# Altium PCB USB TO TTL_BT5032.PcbDoc
Units mil, origin at the board's own origin, x right, y up, seen from the top; angles counter-clockwise.
Board outline 1496.06 x 905.51 mil, 2 copper layers (Top Layer, Bottom Layer); 13 components, 12 nets, 74 pads, 32 vias.
Unrouted connection lines stored in the file: 11.
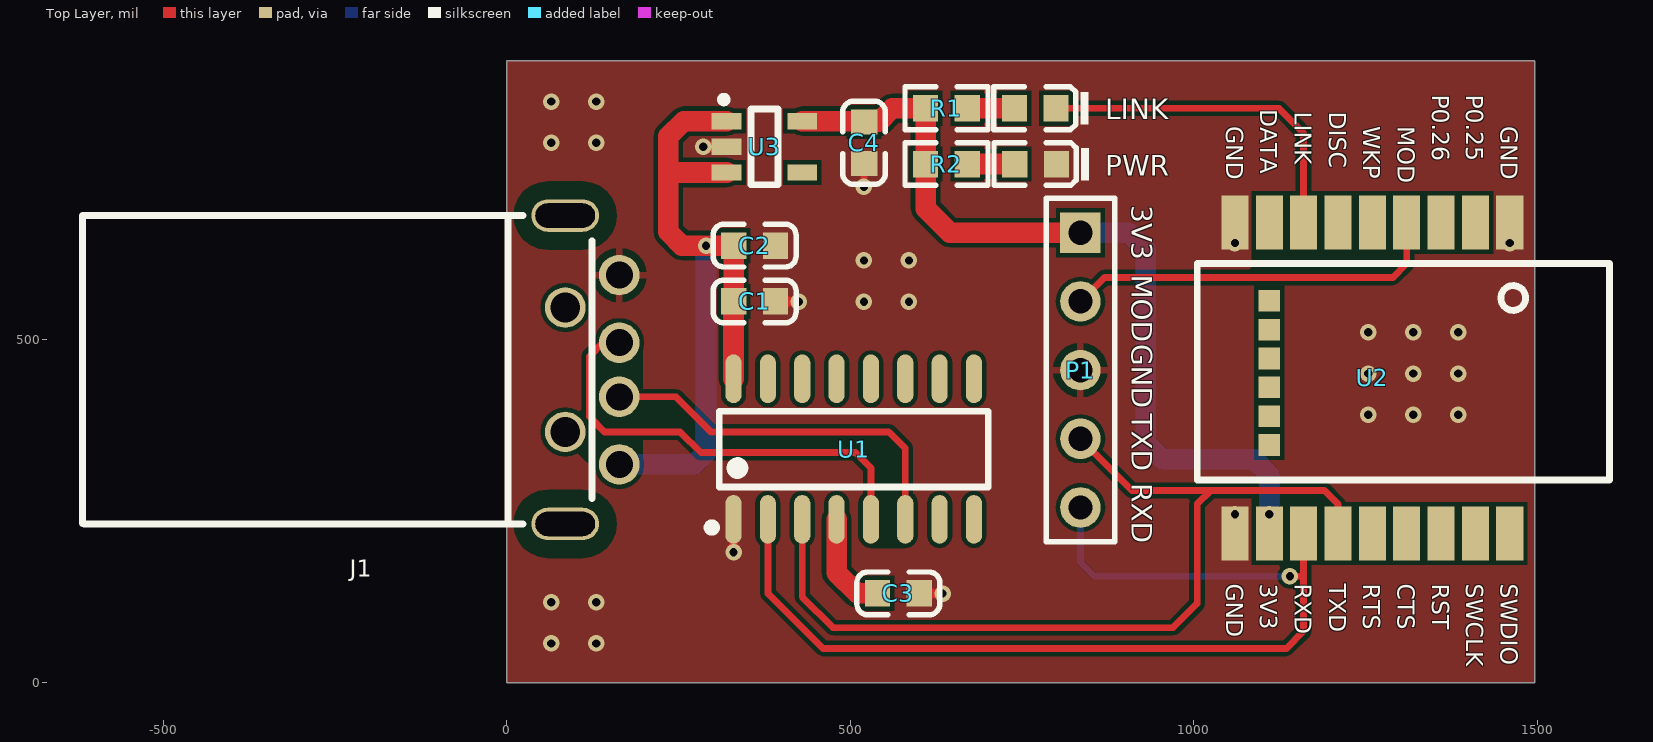
[diagram p0: Top Layer view]
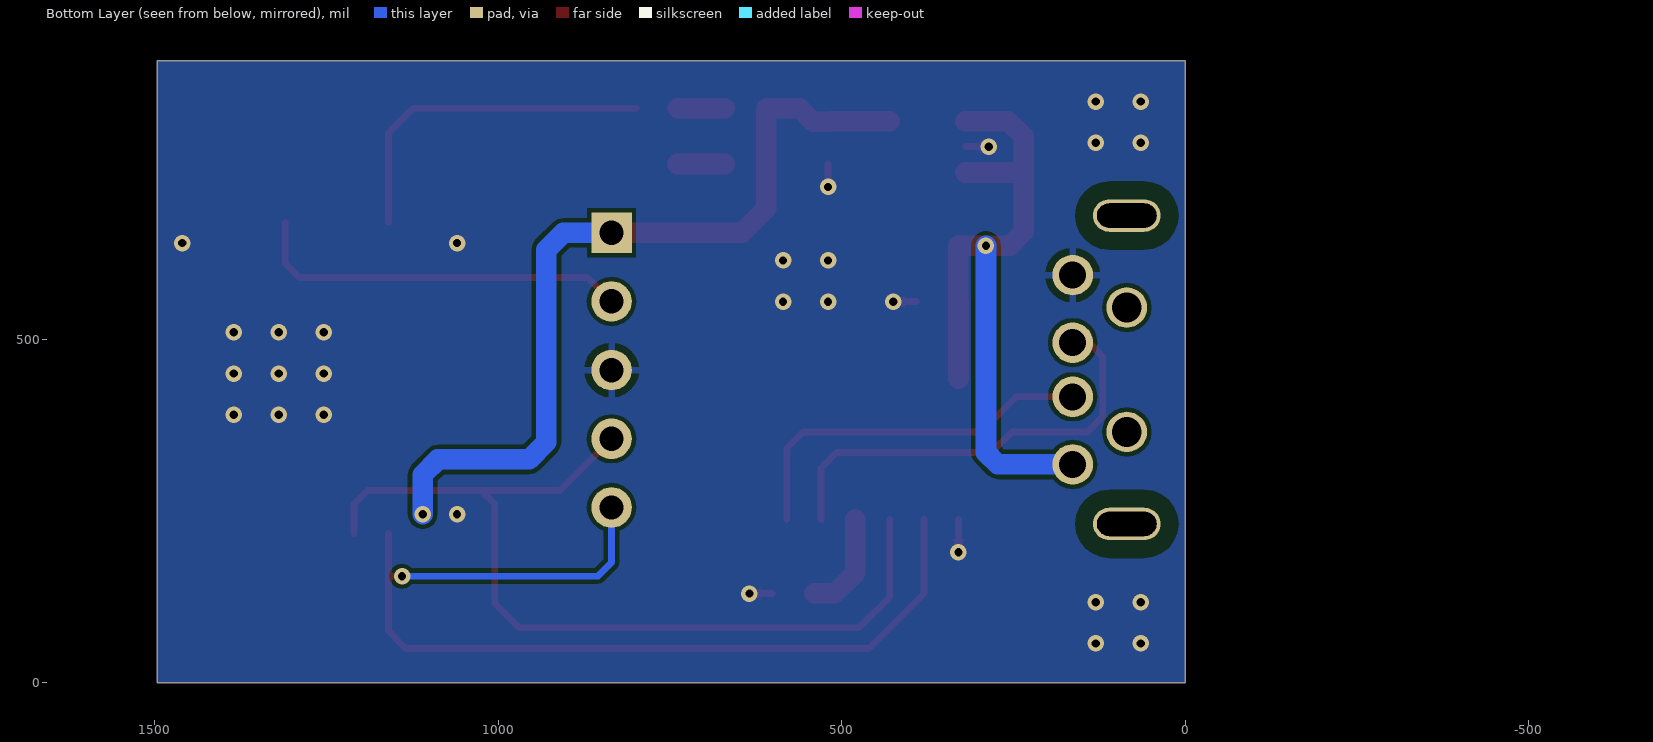
[diagram p1: Bottom Layer view, seen from below]
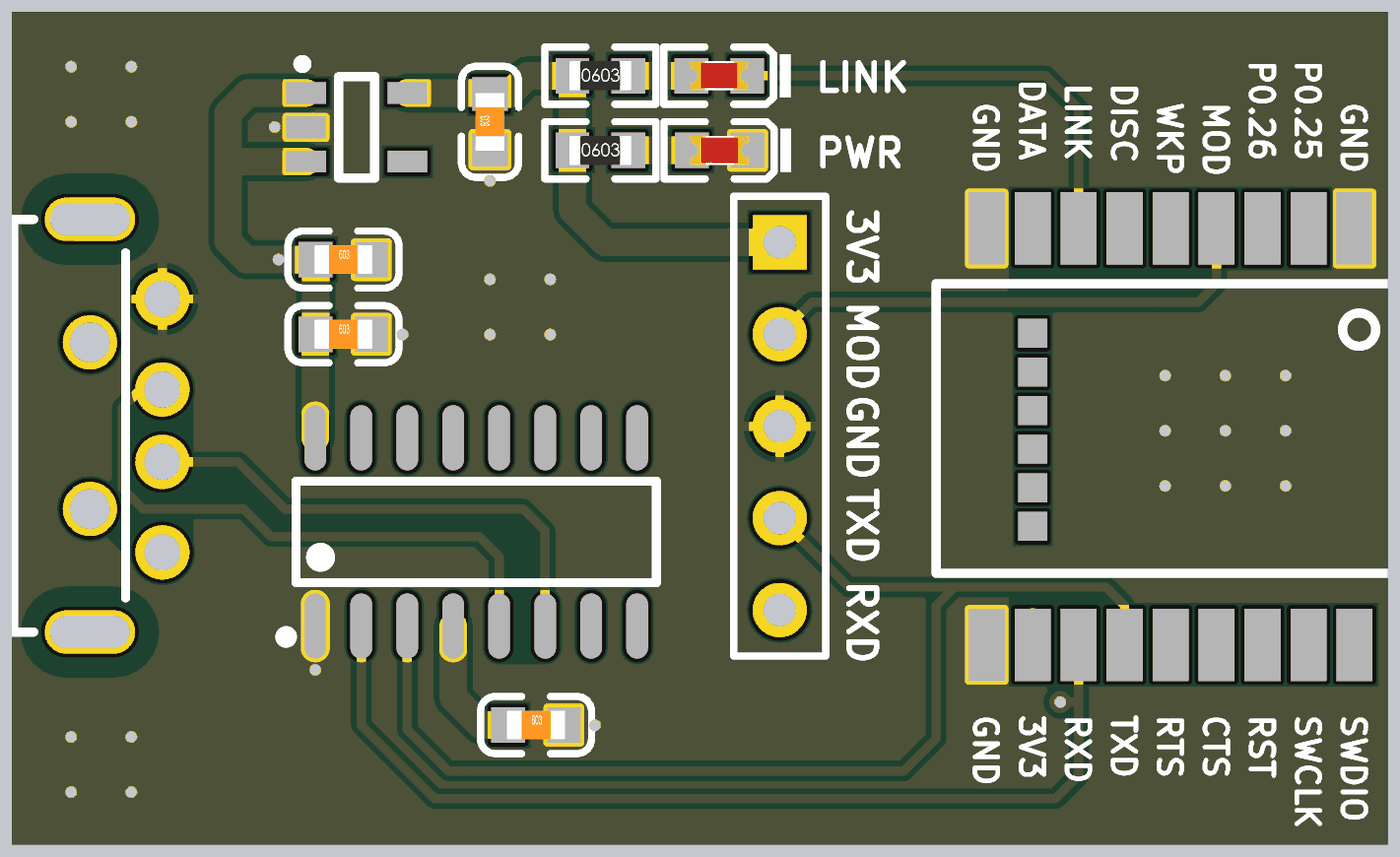
[diagram p2: 3D render of the assembled board from above, using the file's embedded part models]

## Layer stack, top to bottom
Top Solder: solder mask 0.4, Solder Resist, Dk 3.5
Top Layer: signal copper 1.4
Dielectric 1: dielectric 12.6, FR-4, Dk 4.8
Bottom Layer: signal copper 1.4
Bottom Solder: solder mask 0.4, Solder Resist, Dk 3.5

## Board outline
0,0 0,905.51 1496.06,905.51 1496.06,0

## Design rules (kind name [scope] priority, off if disabled: settings)
Clearance [All] p1: gap=6 ignorepadtopadclearanceinfootprint=FALSE
PolygonConnect [All] p1: thpad.connectstyle=Relief thpad.reliefconductorwidth=10 thpad.reliefentries=4 thpad.polygonreliefangle="90 Angle" thpad.airgapwidth=10 smdpad.connectstyle=Direct smdpad.reliefconductorwidth=10 smdpad.reliefentries=4 smdpad.polygonreliefangle="90 Angle" smdpad.airgapwidth=10 via.connectstyle=Direct via.reliefconductorwidth=10 via.reliefentries=4 via.polygonreliefangle="90 Angle" via.airgapwidth=10
RoutingVias [All] p1: holewidth=28 width=50 viastyle="Through Hole" minholewidth=28 minwidth=50 maxholewidth=28 maxwidth=50
SolderMaskExpansion [All] p1: expansion=4
Width [All] p1: maxlimit=30 minlimit=10 preferedwidth=10
30 further rules are at their usual default settings.

## Components (designator, comment, footprint, x,y, rotation, side; value= is the part's Value field where it differs from the comment)
C1 "10uF (106) 20% 6.3V" 0603_C 360.63,555 r0 top
C2 "100nF (104) 10% 16V" 0603_C 360.63,636.18 r0 top
C3 "100nF" 0603_C 570,130 r0 top
C4 "1uF (105) 10% 50V" 0603_C 520,786.01 r90 top
J1 "787616-4" USB-A直插公头 163.74,593.35 r270 top
LINK "绿灯 0603" 0603_LED_S1 769.24,836.18 r180 top
P1 "Header 5" HDR1X5 835,655 r270 top
PWR "红灯 0603" 0603_LED_S1 769.69,755 r180 top
R1 "510Ω" 0603_R 640,836.18 r0 top
R2 "1KΩ" 0603_R 640,755 r0 top
U1 "CH340C" SOIC-16_150mil 505,340 r0 top
U2 "nRF52832" nRF52832 1275,480 r90 top
U3 "SPX5205" SOT-23-5 375,780 r180 top

## Footprints (in the part's own frame and the unit in brackets; to place one, negate y for a bottom-side part, rotate by r counter-clockwise, add the part's x,y. Pads: shape width x height; smd on the part's side, far side on the other; paste and mask are expansions set on the pad)
0603_C [mm]
  rect 0.93x0.98 smd: 1(-0.77,0) 2(0.77,0)
  silkscreen extent -1.53,-0.79 1.54,0.79, body extent -0.8,-0.4 0.8,0.4, height 0.3
0603_LED_S1 [mm]
  rect 0.93x0.98 smd: A(0.77,0) K(-0.77,0)
  silkscreen extent -1.98,-0.79 1.54,0.79, body extent -0.8,-0.4 0.8,0.4, height 0.6
0603_R [mm]
  rect 0.93x0.98 smd: 1(-0.77,0) 2(0.77,0)
  silkscreen extent -1.53,-0.79 1.54,0.79, body extent -0.85,-0.4 0.85,0.4, height 0.56
HDR1X5 [mm] "Connector; Header; 5 Position"
  rect 1.5x1.5 hole 0.9: 1(0,0)
  round 1.5 hole 0.9: 2(2.54,0) 3(5.08,0) 4(7.62,0) 5(10.16,0)
  silkscreen extent -1.27,-1.27 11.43,1.27
nRF52832 [mm]
  rect 2x1 smd: 1(4.826,-4.699) 2(4.826,-3.429) 3(4.826,-2.159) 4(4.826,-0.889) 5(4.826,0.381) 6(4.826,1.651) 7(4.826,2.921) 8(4.826,4.191) 9(4.826,5.461) 16(-6.674,5.461) 17(-6.674,4.191) 18(-6.674,2.921) 19(-6.674,1.651) 20(-6.674,0.381) 21(-6.674,-0.889) 22(-6.674,-2.159) 23(-6.674,-3.429) 24(-6.674,-4.699)
  rect 0.8x0.8 smd: 10(1.93,4.191) 11(0.864,4.191) 12(-0.203,4.191) 13(-1.27,4.191) 14(-2.337,4.191) 15(-3.404,4.191)
  silkscreen extent -4.7,-8.38 3.3,6.86
SOIC-16_150mil [mm]
  oval 0.6x1.8 smd: 1(-4.445,-2.6) 2(-3.175,-2.6) 3(-1.905,-2.6) 4(-0.635,-2.6) 5(0.635,-2.6) 6(1.905,-2.6) 7(3.175,-2.6) 8(4.445,-2.6) 9(4.445,2.6) 10(3.175,2.6) 11(1.905,2.6) 12(0.635,2.6) 13(-0.635,2.6) 14(-1.905,2.6) 15(-3.175,2.6) 16(-4.445,2.6)
  silkscreen extent -5.4,-3.05 4.97,1.4
SOT-23-5 [mm]
  rect 1.1x0.6 smd: 1(1.4,-0.95) 2(1.4,0) 3(1.4,0.95) 4(-1.4,0.95) 5(-1.4,-0.95)
  silkscreen extent -0.5,-1.87 1.62,1.4
USB-A直插公头 [mm]
  round 1.5 hole 1: 1(7,0) 2(4.5,0) 3(2.5,0) 4(0,0)
  oval 1.2x2.5 hole 2.2 slot 0.9 at 0 deg: 5(-2.2,-2) 6(9.2,-2)
  round 1.5 hole 1.1: ""(1.2,-2) ""(5.8,-2)
  silkscreen extent -2.2,-19.84 9.2,-1.02

## Part data
C1: library part "0402 10uF (106) 20% 6.3V", "贴片电容", Package=0402, SuppliersPartNumber=C15525, ComponentLink1Description=供应商, ComponentLink1URL=http://www.szlcsc.com/product/details_16204.html, Supplier=LC
C2 C3: library part "0402 100nF (104) 10% 16V", "贴片电容", Package=0402, SuppliersPartNumber=C1525, ComponentLink1Description=供应商, ComponentLink1URL=http://www.szlcsc.com/product/details_1877.html, Supplier=LC
C4: library part "0603 1uF (105) 10% 50V", "贴片电容", Package=0603, SuppliersPartNumber=C15849, ComponentLink1Description=供应商链接, ComponentLink1URL=http://www.szlcsc.com/product/details_16531.html, Supplier=LC
J1: "USB 1.1, Right Angle, Thru-Hole, A Type, Receptacle, 4 Position, Black", PackageDocument=11-Jan-2004, ComponentLink1Description="Manufacturer Link", ComponentLink1URL=http://www.tycoelectronics.com/, ComponentLink2Description="Packaging Specification", ComponentLink2URL=http://ecommas.tycoelectronics.com/commerce/DocumentDelivery/DDEController?Action=showdoc&DocId=Customer+Drawing%7F787616%7FK%7Fpdf%7FEnglish%7FENG_CD_787616_K.pdf, ContactMaterial="Copper Alloy", ContactPlating="Gold Flash over Palladium Nickel or Gold (30) over Nickel", DatasheetDocument=11-Jan-2004, DrillSize="Corresponds to nominal value.", HousingMaterial=Thermoplastic, PackageReference=787616, PanelGround=Without, PCB_Layout="Complies with manufacturer's recommendation.", Published=15-Jul-2004, Publisher="Altium Limited", TerminationLength="2.84mm [0.112in.]"
LINK: library part "0603 绿灯", "发光二极管", Package=0603, SuppliersPartNumber=C72043, ComponentLink1Description=供应商, ComponentLink1URL=http://www.szlcsc.com/product/details_73152.html, Supplier=LC
P1: "Header, 5-Pin", LatestRevisionDate=17-Jul-2002, LatestRevisionNote="Re-released for DXP Platform.", Publisher="Altium Limited"
PWR: library part "0603 红灯", "发光二极管", Package=0603, SuppliersPartNumber=C2286, ComponentLink1Description=供应商, ComponentLink1URL=http://www.szlcsc.com/product/details_2659.html, Supplier=LC
R1: library part "0603 510Ω (5100) 1%", "贴片电阻", Package=0603, SuppliersPartNumber=C23193, ComponentLink1Description=供应商, ComponentLink1URL=http://www.szlcsc.com/product/details_23920.html, Supplier=LC
R2: library part "0603 1KΩ (1001) 1%", "贴片电阻", Package=0603, SuppliersPartNumber=C21190, ComponentLink1Description=供应商, ComponentLink1URL=http://www.szlcsc.com/product/details_21904.html, Supplier=LC
U1: library part CH340G_[C14267], "USB", Package=SOIC-16_150mil, SuppliersPartNumber=C14267, ComponentLink1Description=供应商, ComponentLink1URL=http://www.szlcsc.com/product/details_14927.html, Supplier=LC

## Via types
v1: diameter 24, hole 12, Top Layer to Bottom Layer, tented both sides, 32 vias

## Nets (pads, with @x,y where several pads share a name; then routed paths per layer and width w, separated by ;. In a path a pad name is that pad's centre, name@x,y a point inside that pad or via, vN(x,y) a via of type N, cw(c..) or ccw(c..) an arc to the next point about the centre after c; other vN are vias at no path point)
3V3: C4.2 P1.1 R1.1 R2.1 U2.17 U3.5 | length 1216.7
  Top Layer w30: U3.5 518.92,817.4 C4.2 541.32,816.32 561.18,836.18 R1.1 R2.1 609.69,690.31 645,655 P1.1
  Bottom Layer w30: P1.1 905,655 930,630 930,350 955,325 1087.76,325 1110,302.76 v1(1110,245)
AGND: C1.2 C2.2 C3.2 C4.1 J1.4 P1.3 PWR.K U1.1 U2.1 U2.9 U2.16 U3.2 | length 183
  Top Layer w10: v1(285.83,780.31) U3.2@319.57,780.31 ; v1(330,190) U1.1 ; C1.2 391.26,554.69 v1(425,554.69) ; v1@519.69,721.64 C4.1@519.69,755.38 ; C3.2@600.63,129.69 v1(634.37,129.69)
  other v1: 64.53,57.07 130,57.07 64.53,117.07 130,117.07 1060,245 1254.06,390 1319.53,390 1385,390 1254.06,450 1319.53,450 1385,450 1254.06,510 1319.53,510 1385,510 519.91,554.69 585.38,554.69 519.91,614.69 585.38,614.69 1060,640 1460,640 519.91,721.64 64.53,786.01 130,786.01 64.53,846.01 130,846.01
BLE_RX: P1.5 U1.2 U2.18 | length 1486.7
  Top Layer w10: U1.2 380,130 460,50 1135,50 1160,75 1160,155 ; v1(1140,155) 1160,155 ; U2.18 1160,155
  Bottom Layer w10: P1.5 835,175 855,155 v1(1140,155)
BLE_TX: P1.4 U1.3 U2.19 | length 1351.2
  Top Layer w10: U1.3 430,125 475,80 970,80 1005,115 1005,260 1025,280 ; P1.4 910,280 1025,280 ; U2.19 1210,260 1190,280 1025,280
LINK: LINK.K U2.7 | length 505.4
  Top Layer w10: LINK.K 1123.82,836.18 1160,800 U2.7
MODE: P1.2 U2.4 | length 557.8
  Top Layer w10: P1.2 870,590 1290,590 1310,610 U2.4
NetC3_1: C3.1 U1.4 | length 149.7
  Top Layer w30: U1.4 480,160 510,130 C3.1
NetLINK_A: LINK.A R1.2 | length 68.6
  Top Layer w30: R1.2 LINK.A
NetPWR_A: PWR.A R2.2 | length 69.1
  Top Layer w30: R2.2 PWR.A
USBDM: J1.2 U1.6 | length 550.8
  Top Layer w10: J1.2 246.19,416.18 297.37,365 556,365 580,341 U1.6
USBDP: J1.3 U1.5 | length 655.7
  Top Layer w10: J1.3 139.92,494.92 120,475 120,387.31 142.31,365 252.37,365 282.37,335 507.76,335 530,312.76 U1.5
VCC: C1.1 C2.1 J1.1 U1.16 U3.1 U3.3 | length 1051
  Top Layer w30: U3.3 237.6,742.6 235,740 ; U3.1 257.4,817.4 235,795 235,740 ; U1.16 330,554.69 C1.1 C2.1 v1(290,636.18) 255.04,636.18 235,656.22 235,740
  Bottom Layer w30: J1.1 272.76,317.76 290,335 v1(290,636.18)
pads on no net: J1. J1.5 J1.6 U1.7 U1.8 U1.9 U1.10 U1.11 U1.12 U1.13 U1.14 U1.15 U2.2 U2.3 U2.5 U2.6 U2.8 U2.10 U2.11 U2.12 U2.13 U2.14 U2.15 U2.20 U2.21 U2.22 U2.23 U2.24 U3.4

## Polygon pours and split planes (outlines as drawn)
AGND on Top Layer "Top Layer-AGND" (solid, remove dead copper, pour order 0): 0,905 0,0 1495,0 1495,905
AGND on Bottom Layer "Bottom Layer-AGND" (solid, remove dead copper, pour order 2): 0,905 0,0 1495,0 1495,905

## Other copper
Top Layer:
  pour cut-out: 197.55,492.9 197.55,309.29 198.35,308.48 129.13,308.48 100,337.61 100,388.4 108.78,397.18 108.78,475 179.65,475
  pour cut-out: 530,195.86 580,195.86 561.84,214.02 561.84,258.55 560.18,258.55 557.48,261.26 548.16,261.26 548.16,208.45 548.16,214.02
  pour cut-out: 197.55,404.97 241.55,404.97 291.87,354.64 550.5,354.64 568.78,336.35 568.78,272.57 557.48,261.26 548.16,261.26 548.16,268.06 537.93,278.28 537.93,320.69 536.72,320.69 511.19,346.22 285.81,346.22 255.81,376.22 170.66,376.22 170.66,380.89 170.34,381.22
  pour cut-out: 1084.32,262.61 1180.29,262.61 1182.14,264.46 1182.14,268.78 1084.9,268.78 1084.32,269.37
  pour cut-out: 1085,610.36 1085.85,611.22 1290.35,611.22 1290.35,606.22 1285.35,601.22 1084.9,601.22 1084.31,600.63 1084.31,611.05
  pour cut-out: 1084.32,624.63 1084.32,611.05 1085,610.36 1085.85,611.22 1290.35,611.22 1298.77,619.63 1298.75,619.65 1298.75,624.63
  pour cut-out: 302.01,465

## Silkscreen, mask and mechanical layers (free items; w line width, h text height)
Top Overlay:
  text "P0.26" at 1347,855.82 h25 r270
  text "P0.25" at 1397,855.82 h25 r270
  text "DATA" at 1097,834.99 h25 r270
  text "LINK" at 1147,830.83 h25 r270
  text "DISC" at 1197,830.83 h25 r270
  text "GND" at 1047,810 h25 r270
  text "WKP" at 1247,810 h25 r270
  text "MOD" at 1297,810 h25 r270
  text "GND" at 1447,810 h25 r270
  text "3V3" at 910,695 h30 r270
  text "MOD" at 910,593.75 h30 r270
  text "GND" at 910,492.5 h30 r270
  text "TXD" at 910,391.25 h30 r270
  text "RXD" at 910,290 h30 r270
  text "GND" at 1047,143.89 h25 r270
  text "3V3" at 1097,143.89 h25 r270
  text "RXD" at 1147,143.89 h25 r270
  text "TXD" at 1197,143.89 h25 r270
  text "RTS" at 1247,143.89 h25 r270
  text "CTS" at 1297,143.89 h25 r270
  text "RST" at 1347,143.89 h25 r270
  text "SWCLK" at 1397,143.89 h25 r270
  text "SWDIO" at 1447,143.89 h25 r270
Mechanical 1:
  the board outline again, w20

## Dimensions
0,905.51 to 0,0 on Mechanical 1
0,0 to 1496.06,0 on Mechanical 1